# Altium PCB 02-00037-000.PcbDoc (part 2 of 2)
Units mm, origin at the board's own origin, x right, y up, seen from the top; angles counter-clockwise.
Board outline 55.7 x 52.44 mm, 2 copper layers (L1_TOP, L2_BOTTOM), stack 0.71 mm thick; 73 components, 59 nets, 225 pads, 11 vias.
Unrouted connection lines stored in the file: 130.
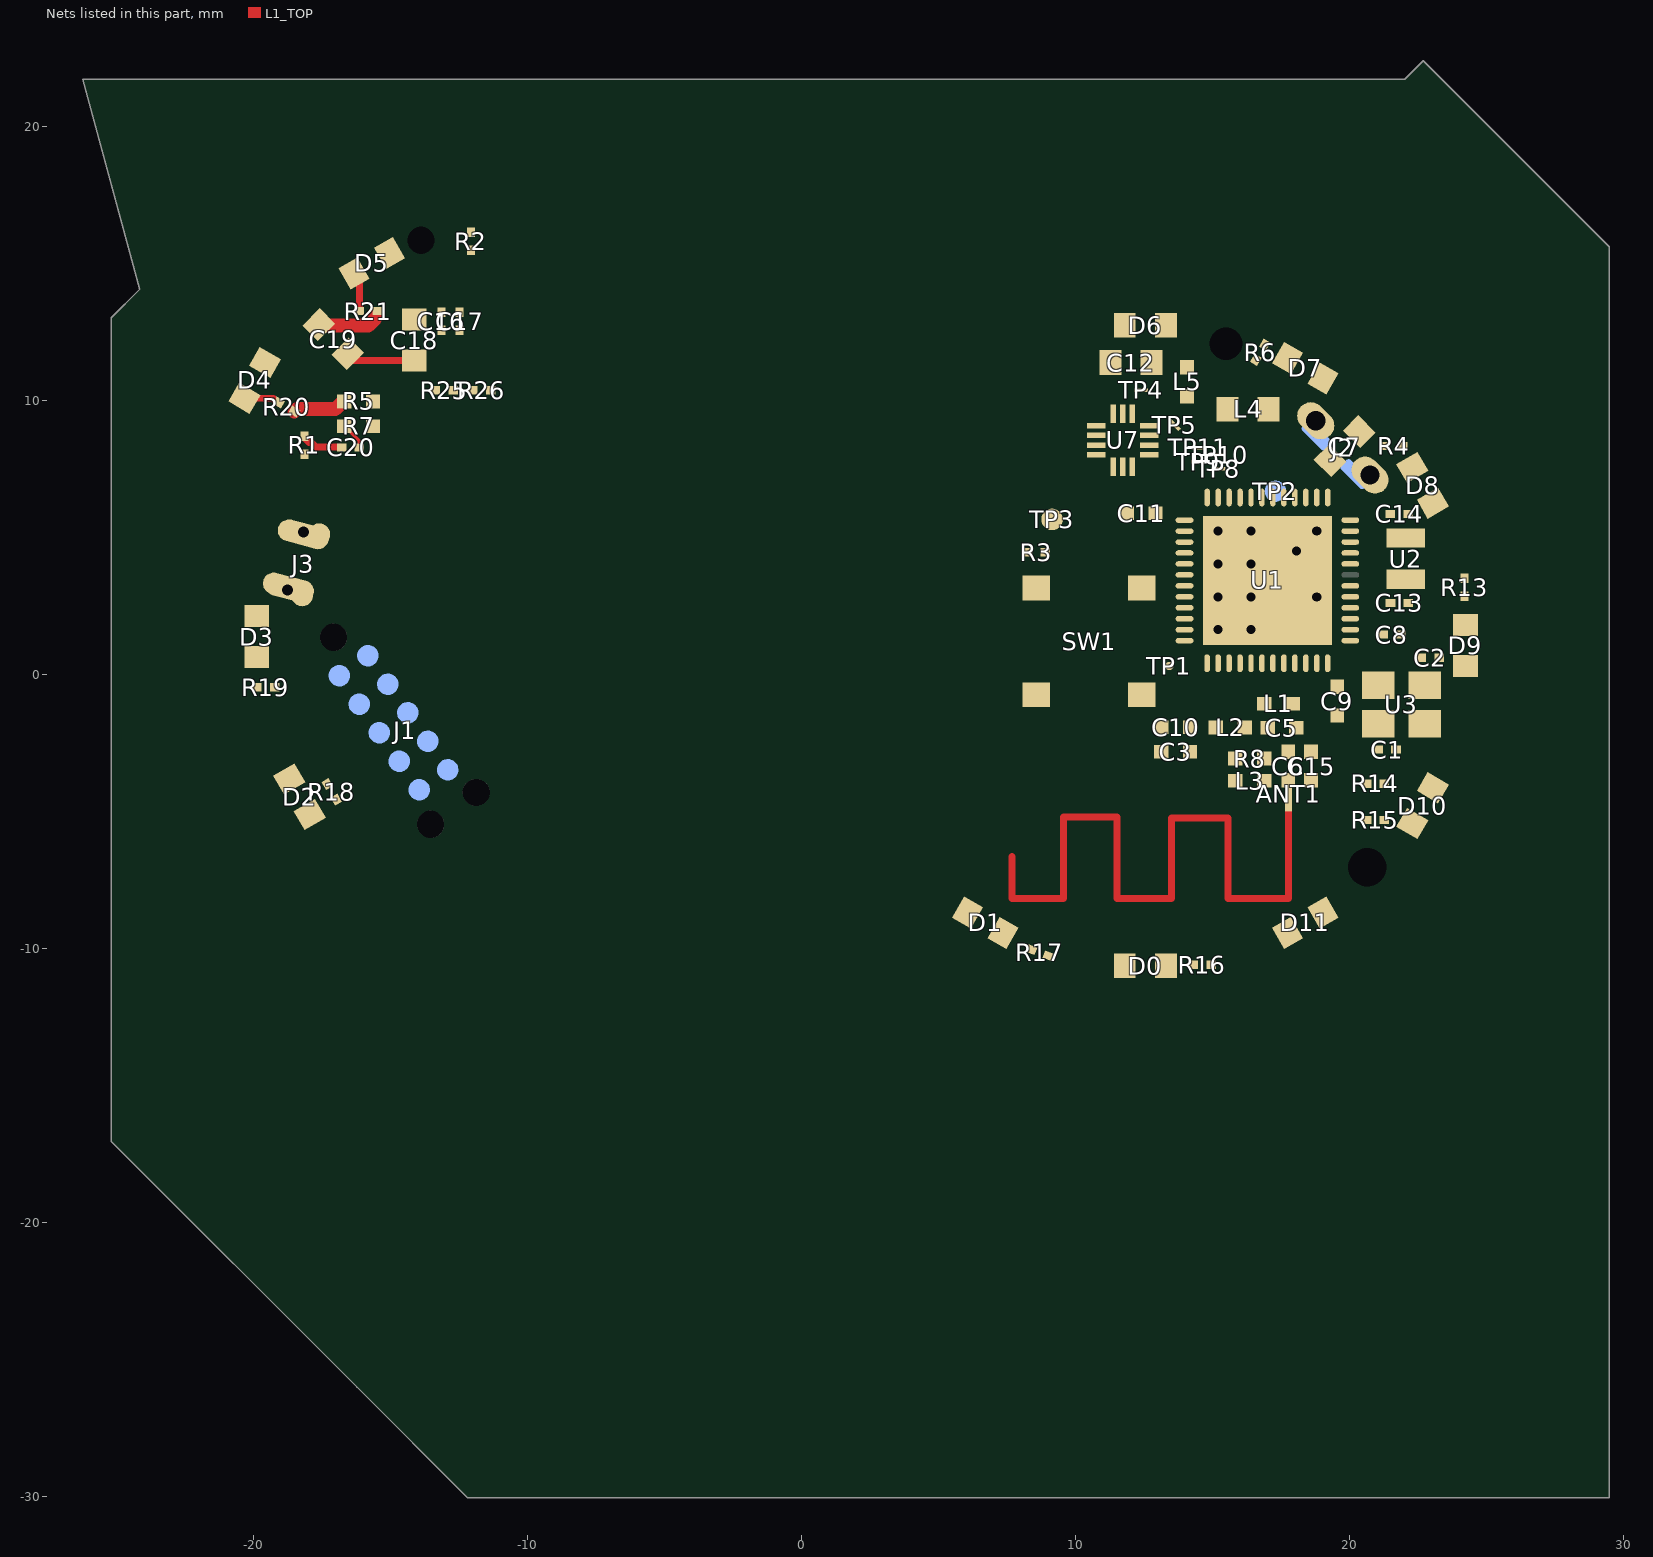
[diagram p2: the nets of this part, all layers, seen from the top]

## Part data
ANT1: library part 03-07140-000, "Nordic-Based Trace Antenna per PCB400003"
C1 C2: library part 03-02453-000
C3: library part 03-01841-000
C5: library part 03-01536-000
C6: library part 03-01539-000
C7: library part 03-01442-000
C8 C16 C17: library part 03-02751-000
C9: library part 03-01810-000
C10: library part 03-02012-000
C11: library part 03-02077-000
C12: library part 03-01346-000
C13 C14: library part 03-02464-000
C15: library part 03-01494-000
C18 C19: library part 03-01465-000
C20: library part 03-02706-000
D0 D1 D2 D3 D4 D5 D6 D7 D8 D9 D10 D11: library part 03-07205-000, "Light Emitting Diode"
J1: library part 03-07153-000, "Tag-Connect plug of nails  PCB mating contacts - Nordic REV"
J2: library part 03-07197-000
J3: library part 03-07148-000
L1: library part 03-07166-000
L2: library part 03-07167-000
L3: library part 03-07203-000
L4: library part 03-07169-000
L5: library part 03-07170-000
R1: library part 03-03710-000
R2 R4 R6 R13 R14 R15 R16 R17 R18 R19 R20 R21: library part 03-03249-000
R3: library part 03-03256-000
R5 R7: library part 03-04846-000
R8: library part 03-04000-000
R25 R26: library part 03-03263-000
SW1: library part 03-07195-000
TP1: library part 03-07143-000, "Test Point"
TP2 TP3: library part 03-07130-000, "Test Point"
TP4 TP5 TP8 TP9 TP10 TP11: library part 03-07196-000, "Test Point"
U1: library part 03-07191-000
U2: library part 03-07202-000, "Generic 2-port oscillator"
U3: library part 03-07138-000, "Generic 4-port oscillator"
U7: library part 03-07192-000, "STMicro 3-axis accelerometer"

## Free pads (board coordinates)
  round 0 hole 1 unplated: 0(-13.879,15.837)
  round 0 hole 1.2 unplated: 0(15.504,12.066)
  round 0 hole 1.4 unplated: 0(20.65,-7.042)

## Via types
v1: diameter 0.66, hole 0.33, L1_TOP to L2_BOTTOM, 11 vias

## Nets (pads, with @x,y where several pads share a name; then routed paths per layer and width w, separated by ;. In a path a pad name is that pad's centre, name@x,y a point inside that pad or via, vN(x,y) a via of type N, cw(c..) or ccw(c..) an arc to the next point about the centre after c; other vN are vias at no path point)
ACCEL_INT1: TP4.1 U1.4 U7.6
ACCEL_INT2: TP5.1 U1.5 U7.5
ACCEL_SPI_CLK: TP8.1 U1.9 U7.1
ACCEL_SPI_CS: TP11.1 U1.6 U7.4
ACCEL_SPI_MISO: TP10.1 U1.7 U7.3
ACCEL_SPI_MOSI: TP9.1 U1.8 U7.2
ACCEL_VDD: C16.2 C17.1 C18.1 TP3.1 U1.14 U7.7 U7.8
ANT: ANT1.1 C6.1 C15.2 L3.2
ANT1: L1.1 L2.2 U1.31
ANT2: C5.1 L1.2 U1.32
AVDD: C9.1 C12.2 L5.1 TP2.1 U1.35 U1.36
DEC1: C8.2 U1.39
DEC2: C10.1 U1.29
GND: C1.2 C2.1 C3.2 C6.2 C7.2 C8.1 C9.2 C10.2 C11.2 C12.1 C13.1 C14.1 C15.1 C16.1 C17.2 C18.2 C19.1 C20.1 J1.1 J3.1 J3.2 R1.2 R3.1 R8.1 R25.2 SW1.3 SW1.4 U1.13 U1.33 U1.34 U1.49 U3.2 U3.4 U7.9 U7.10 U7.11 U7.12 U7.13 U7.14 | length 3.8
  L1_TOP w0.254: R1.2@-18.13,8.683 -18.13,8.624 -17.968,8.462 -17.875,8.462 -17.712,8.299 C20.1@-16.828,8.299 ; C19.1@-16.408,11.448 C18.2@-14.122,11.448
  other v1: 15.212,1.629 16.412,1.629 15.212,2.829 16.412,2.829 18.812,2.829 15.212,4.029 16.412,4.029 18.078,4.496 15.212,5.229 16.412,5.229 18.812,5.229
LED0: D0.2 U1.27
LED1: D1.2 U1.26
LED2: D2.2 U1.18
LED3: D3.2 U1.16
LED4: D4.2 U1.15
LED5: D5.2 U1.3
LED6: D6.2 U1.47
LED7: D7.2 U1.48
LED8: D8.2 U1.41
LED9: D9.2 U1.40
LED10: D10.2 U1.44
LED11: D11.2 U1.42
LP_GPIO: J1.9 U1.28
LP_SW: C20.2 J1.10 R7.1 TP1.1 U1.25 | length 1.4
  L1_TOP w0.127: R7.1@-16.796,9.201 -16.125,8.53 C20.2@-16.125,8.283 ; R7.1@-16.68,8.876 R7.1@-16.68,9.058
NetC5_2: C5.2 L3.1 R8.2
NetD0_1: D0.1 R16.2
NetD1_1: D1.1 R17.2
NetD2_1: D2.1 R18.2
NetD3_1: D3.1 R19.2
NetD4_1: D4.1 R20.2 | length 1.3
  L1_TOP w0.254: D4.1@-20.323,10.076 -19.27,10.076 R20.2@-19.101,9.906
NetD5_1: D5.1 R21.2 | length 1.2
  L1_TOP w0.254: R21.2@-16.13,13.258 D5.1@-16.13,14.453
NetD6_1: D6.1 R2.2
NetD7_1: D7.1 R6.2
NetD8_1: D8.1 R4.2
NetD9_1: D9.1 R13.2
NetD10_1: D10.1 R14.2
NetD11_1: D11.1 R15.2
NetL4_1: L4.1 L5.2
NetL4_2: L4.2 U1.2
NetR3_2: R3.2 U1.17
NetR5_2: R5.2 R7.2 SW1.1 SW1.2
NetR26_1: R26.1 U1.11
NRF_SWCLK: J1.5 R1.1 U1.24
NRF_SWDIO: J1.6 U1.23
NRF_UART_CTS: J1.4 U1.21
NRF_UART_RTS: J1.7 U1.22
NRF_UART_RX: J1.8 U1.20
NRF_UART_TX: J1.3 U1.19
PCBA_REV: R25.1 R26.2 U1.10
VBAT: C7.1 C11.1 C19.2 J1.2 J2.1 J2.2 R2.1 R4.1 R5.1 R6.1 R13.1 R14.1 R15.1 R16.1 R17.1 R18.1 R19.1 R20.1 R21.1 U1.1 U1.12 | length 4.2
  L1_TOP w0.5: R20.1@-18.498,9.596 -18.409,9.685 -17.004,9.685 R5.1@-16.783,9.906 ; C19.2@-17.61,12.763 -17.578,12.731 -15.799,12.731 -15.578,12.952 R21.1@-15.578,13.162
VDD_PA: C3.1 L2.1 U1.30
XC1: C1.1 U1.37 U3.1
XC2: C2.2 U1.38 U3.3
XL1: C14.2 U1.46 U2.2
XL2: C13.2 U1.45 U2.1
pads on no net: J1. J1.11 J1.12 J1.13 U1.43

## Polygon pours and split planes (outlines as drawn)
GND on L1_TOP "L1_TOP-GND" (solid, remove dead copper, shelved, pour order 10): -8.276,-9.301 ccw(c0,0) -9.276,-8.304 -9.266,-8.309 -8.584,-7.626 -8.599,-7.637 cw(c-8.104,-8.131) -7.609,-8.626
no net on Silkscreen Bottom "L1_TOP_GND" (hatched 90Degree grid 0 track 0.051, shelved): -1.265,9.362 -1.265,10.584 0.007,9.816 0.025,9.816 1.296,10.584 1.296,9.362 1.163,9.362 0.881,9.527 0.881,9.87 0.879,9.867 0.29,9.511 1.629,8.726 1.629,11.162 1.631,11.162 0.025,10.192 0.006,10.192 -1.599,11.162 -1.597,11.162 -1.597,8.726 -0.259,9.511 -0.847,9.867 -0.849,9.87 -0.849,9.527 -1.132,9.362
no net on Silkscreen Bottom "L1_TOP-Ant" (solid, shelved): -10.848,1.66 -10.847,1.66 -10.173,4.035 cw(c-10.05,4) -10.025,4.125 cw(c-10,4) -9.966,4.123 -3.491,2.323 cw(c-3.525,2.2) -3.398,2.2 cw(c-3.525,2.2) -3.402,2.165 -4.077,-0.21 cw(c-4.2,-0.175) -4.225,-0.3 cw(c-4.25,-0.175) -4.284,-0.298 -10.759,1.502 cw(c-10.725,1.625)
GND on L2_BOTTOM "L2_BOTTOM_GND" (solid, remove dead copper, shelved, pour order 9): 0,-10.16 cw(c0,0) -10.16,0 cw(c0,0) 0,10.16 cw(c0,0) 10.16,0 cw(c0,0)
VBAT on L2_BOTTOM "L2_BOT_VBAT" (solid, remove dead copper, shelved, pour order 13): 0,-12.45 cw(c0,0) -12.45,0 cw(c0,0) 0,12.45 cw(c0,0) 12.45,0 cw(c0,0)

## Keep-outs
Keep-Out Layer:
  lines w0.05: -9.276,-8.304 cw(c0,0) -8.276,-9.301 -7.609,-8.626 ccw(c-8.104,-8.131) -8.599,-7.637 -8.584,-7.626 -9.266,-8.309 ; 4.944,-7.572 4.944,-7.572

## Other copper
L1_TOP:
  region net AVDD: 18.714,0.392 18.714,-0.566 18.872,-0.724 19.818,-0.724 19.818,-0.19 19.239,0.389
  region net GND: 16.639,-2.821 17.239,-2.821 17.514,-2.546 19.089,-2.546 19.089,-3.096 17.514,-3.096 17.289,-3.321 16.639,-3.321
  pour cut-out: 20.264,0.404 23.514,0.404 23.514,-2.446 20.264,-2.446
  pour cut-out: -13.106,-12.827 -13.106,-4.43 13.158,-4.428 13.151,-12.827
  pour cut-out: 21.204,5.454 22.904,5.454 22.904,2.904 21.204,2.904
  pour cut-out: 18.494,0.629 18.494,-1.498 18.889,-1.671 18.89,-4.28 12.964,-4.271 12.964,-3.446 13.714,-3.446 13.714,-0.996 15.463,-0.164 15.461,0.597
  pour cut-out: 10.714,9.739 12.929,9.739 12.929,7.639 12.874,7.584 10.714,7.584
  pour cut-out: 13.604,6.435 13.604,0.429 19.929,0.429 19.929,6.462
  pour cut-out: 20.072,-0.876 18.472,-0.876 18.472,-0.749 20.072,-0.749
  region net GND: 18.879,-1.613 18.879,-2.451 18.777,-2.553 18.777,-3.086 18.894,-3.174 18.894,-3.376 19.133,-3.376 19.133,-1.613
  region net ACCEL_VDD: -10.897,13.418 -10.897,13.926 -10.973,14.002 -14.224,14.002 -14.58,13.646 -14.58,12.554 -13.665,12.554 -13.665,12.91 -13.538,13.037 -12.192,13.037 -11.938,12.783 -11.709,12.783 -11.709,13.373 -11.665,13.418
  region net GND: 10.674,8.826 10.141,8.826 10.039,8.928 9.074,8.928 8.973,8.826 8.973,8.217 8.795,8.039 7.804,8.039 7.804,7.226 8.642,6.388 9.201,6.388 9.201,6.769 9.658,7.226 12.173,7.226 12.173,7.531 10.731,7.531 10.674,7.588
  pour cut-out: -14.376,12.757 -14.986,12.148 -14.986,10.852 -13.614,9.481 -11.709,9.481 -11.709,12.757
  pour cut-out: -13.879,15.187 cw(c-13.879,15.837) -14.529,15.837 cw(c-13.879,15.837) -13.879,16.487 cw(c-13.879,15.837) -13.229,15.837 cw(c-13.879,15.837)
  pour cut-out: 15.504,11.206 cw(c15.504,12.054) 14.655,12.054 cw(c15.504,12.054) 15.504,12.903 cw(c15.504,12.054) 16.352,12.054 cw(c15.504,12.054)
L2_BOTTOM:
  region net GND: 21.996,6.496 21.138,6.496 21.139,6.109 21.723,5.397 22.174,5.397 22.003,5.569
  pour cut-out: 20.829,-4.596 20.329,-4.596 20.329,-3.796 20.829,-3.796
  region net VBAT: 22.579,-3.833 20.492,-3.833 20.329,-3.996 20.329,-4.846 22.579,-4.846
  pour cut-out: 20.804,-3.671 20.304,-3.671 20.304,-2.871 20.804,-2.871
  region net GND: 20.329,-2.146 20.329,-3.521 20.504,-3.696 22.554,-3.696 23.479,-2.771 23.479,-2.137
  pour cut-out: 4.845,-3.371 20.194,-3.369 20.194,-11.484 4.843,-11.484
  pour cut-out: -10.18,-1.015 -7.614,0.92 -3.194,-5.363 -5.828,-7.231
  region net GND: 21.229,5.479 22.81,5.48 22.892,5.397 22.892,4.534 22.943,4.483 23.501,4.483 23.603,4.381 23.604,1.773 22.714,1.206 22.104,1.206 21.229,2.304
  pour cut-out: 20.304,-6.021 23.629,-6.021 23.629,-8.846 20.301,-8.846
  pour cut-out: -13.879,15.187 cw(c-13.879,15.837) -14.529,15.837 cw(c-13.879,15.837) -13.879,16.487 cw(c-13.879,15.837) -13.229,15.837 cw(c-13.879,15.837)
  pour cut-out: 15.529,11.297 cw(c15.529,12.145) 14.681,12.145 cw(c15.529,12.145) 15.529,12.994 cw(c15.529,12.145) 16.378,12.145 cw(c15.529,12.145)

## Silkscreen, mask and mechanical layers (free items; w line width, h text height)
Silkscreen Top:
  circle w0.167: c5.606,-1.541 r0.572
  lines w0.065: -8.721,-7.715 -8.5,-7.467 -7.314,-6.611 ; 4.903,-7.683 5.141,-7.451 5.942,-6.228 5.963,-6.188 5.977,-6.146 5.983,-6.102 5.982,-6.057 5.972,-6.013 5.956,-5.972 5.932,-5.934 5.902,-5.901 5.859,-5.862 5.817,-5.823 5.775,-5.783 5.734,-5.743 5.692,-5.703 5.651,-5.663 5.609,-5.623 5.568,-5.583 5.534,-5.554 5.495,-5.532 5.453,-5.517 5.409,-5.51 5.364,-5.51 5.32,-5.518 5.278,-5.534 5.24,-5.557 ; 14.547,10.648 14.548,10.692 14.732,12.143 14.845,12.455 15.079,12.691 15.392,12.804 15.723,12.775 16.01,12.607 16.199,12.334 16.254,12.006 16.164,11.686 15.474,10.397 15.449,10.36 15.418,10.327 15.382,10.3 15.342,10.28 15.3,10.268 15.255,10.263 15.211,10.266 15.167,10.276 15.112,10.295 15.058,10.313 15.003,10.331 14.948,10.348 14.893,10.366 14.838,10.383 14.783,10.4 14.728,10.416 14.687,10.433 14.649,10.456 14.615,10.486 14.588,10.521 14.567,10.561 14.553,10.603 14.547,10.648 ; 19.175,-6.127 19.181,-6.171 19.195,-6.213 19.216,-6.253 20.017,-7.476 20.255,-7.708 20.569,-7.816 20.9,-7.782 21.184,-7.61 21.369,-7.333 21.419,-7.005 21.325,-6.686 21.104,-6.438 19.918,-5.582 19.879,-5.559 19.838,-5.543 19.794,-5.535 19.749,-5.535 19.705,-5.542 19.663,-5.557 19.624,-5.579 19.589,-5.608 19.548,-5.648 19.507,-5.688 19.466,-5.728 19.424,-5.768 19.383,-5.808 19.341,-5.848 19.299,-5.887 19.256,-5.926 19.226,-5.959 19.202,-5.997 19.186,-6.038 19.176,-6.082 19.175,-6.127
  lines w0.102: 13.994,7.304 15.699,7.304 15.699,8.471 13.994,8.471 13.994,7.304
  lines w0.167: -8.53,-0.964 -7.163,-2.488 ; -8.527,-2.083 -7.454,-2.872 ; 5.188,-0.454 5.521,-0.963 ; 5.51,0.31 6.048,-1.114
  text "4" at 11.784,10.254 h0.25
  text "3" at -13.98,9.333 h0.25
  text "5" at 14.054,8.754 h0.25
  text "GND" at -10.975,2.725 h0.51 r343
  text "1" at 13.379,0.629 h0.23
  text "FL" at 6.572,-2.33 h0.64
Silkscreen Bottom:
  rectangle: 9.322,-8.941 17.247,-6.839
  lines w0.062: -11.427,13.61 -11.427,16.046 ; -11.095,15.467 -11.095,14.245 -10.962,14.245 ; 10.955,12.217 12.56,11.247 ; 10.957,9.781 12.295,10.565 11.707,10.921 ; 11.289,11.638 12.561,10.87 ; 11.422,10.416 11.705,10.581 11.705,10.924 ; 12.579,10.87 13.85,11.638 13.85,10.416 13.717,10.416 13.435,10.581 13.435,10.924 ; 12.579,11.247 14.184,12.217 ; 13.433,10.921 12.844,10.565 14.183,9.781 14.183,12.217
  lines w0.127: 9.271,-5.62 20.066,-5.62
  text "AR & GR" at 13.485,9.471 h0.51
  text "Designed" at 14.757,8.369 h1.78
  text "V+" at 22.379,7.729 h0.51
  text "in" at 13.011,7.449 h1.78
  text "2" at 18.114,6.574 h0.25
  text "San Francisco" at 16.453,6.452 h1.78
  text ".PCBPartNumber" at 16.596,-4.373 h0.64
  text "PCB" at 19.202,-4.375 h0.64
  text ".PCBRevision" at 16.596,-5.351 h0.64
  text "REV" at 19.202,-5.351 h0.64
  text ".PCBAPartNumber" at 16.485,-6.56 h0.64
  text "PCBA" at 19.202,-6.56 h0.64
  text "REV" at 19.202,-7.55 h0.64
Outline:
  lines w0.05: -9.289,-8.29 cw(c0,0) -8.291,-9.287 ; -9.285,-8.296 -8.591,-7.601 cw(c-8.096,-8.096) -7.601,-8.591 -8.296,-9.285
Fab_Notes:
  text "Fabrication Notes:" at -21.615,14.554 h0.76
  text "1) PCB thickness tolerance: 0.75mm +/-0.1mm" at -21.615,11.472 h0.76
  text "2) PCB outline tolerance: +/-0.1mm" at -21.615,8.819 h0.76
  text "4) Fiducials must be added to Panel to ensure layer alignment." at -21.725,3.875 h0.76
  text "Add 3 fiducials on both top and bottom" at -21.8,1.575 h0.76
  text "Top and Bottom Silkscreen Color: White" at -21.851,-0.73 h0.76
  text "Soldermask Color: Black" at -21.844,-3.277 h0.76
  text "FR4: ShengYi S1141" at -21.806,-5.918 h0.76
  text "NPTH Tolerance: +/- 0.05mm" at -21.806,-8.414 h0.76
  text "3) Finish: ENIG, minimum plating thickness: Nickel: 3um, Au: 0.03um" at -17.278,-10.465 h0.76
Layer_17:
  circle w0.025: c0,0 r12.45
Drill Drawing:
  lines w0.1: -27.701,-17.992 32.501,-17.992 ; -27.701,-16.252 32.501,-16.252 ; -29.225,-26.475 ccw(c-28.675,-26.475) -28.675,-27.025 33.475,-27.025 ccw(c33.475,-26.475) 34.025,-26.475 34.025,-14.1 ccw(c33.475,-14.1) 33.475,-13.55 -28.675,-13.55 ccw(c-28.675,-14.1) -29.225,-14.1 -29.225,-26.475
  text "Layer Stack Up Detail for: B01002_PCB.PcbDoc" at -27.701,-15.691 h1.05
  text "Layer" at -27.701,-16.902 h0.4
  text "Gerber" at -15.27,-16.902 h0.4
  text "Copper" at -8.141,-16.902 h0.4
  text "Dielectric" at -0.359,-16.902 h0.4
  text "Dielectric" at 7.703,-16.902 h0.4
  text "Dielectric" at 17.384,-16.902 h0.4
  text "Dielectric" at 25.446,-16.902 h0.4
  text "Name" at -27.701,-17.702 h0.4
  text "Document" at -15.27,-17.702 h0.4
  text "Thickness" at -8.141,-17.702 h0.4
  text "Height" at -0.359,-17.702 h0.4
  text "Material" at 7.703,-17.702 h0.4
  text "Constant" at 17.384,-17.702 h0.4
  text "Type" at 25.446,-17.702 h0.4
  text "Top Solder Mask" at -27.701,-19.305 h0.55
  text "(.GTS)" at -15.27,-19.305 h0.55
  text "0.02mm" at -0.359,-19.305 h0.55
  text "Solder Resist" at 7.703,-19.305 h0.55
  text "3.50" at 17.384,-19.305 h0.55
  text "L1_TOP" at -27.701,-20.989 h0.55
  text "(.GTL)" at -15.27,-20.989 h0.55
  text "0.0175mm" at -8.141,-20.989 h0.55
  text "0.725mm" at -0.359,-21.832 h0.55
  text "FR-4" at 7.703,-21.832 h0.55
  text "4.30" at 17.384,-21.832 h0.55
  text "Core" at 25.446,-21.832 h0.55
  text "L2_BOTTOM" at -27.701,-22.674 h0.55
  text "(.GBL)" at -15.27,-22.674 h0.55
  text "0.0175mm" at -8.141,-22.674 h0.55
  text "Bottom Solder Mask" at -27.701,-24.358 h0.55
  text "(.GBS)" at -15.27,-24.358 h0.55
  text "0.02mm" at -0.359,-24.358 h0.55
  text "Solder Resist" at 7.703,-24.358 h0.55
  text "3.50" at 17.384,-24.358 h0.55
  text ".legend" at -19.253,-45.212 h0.76
  text "NPTH Tolerance: +/- 0.05mm" at -19.241,-48.597 h0.76